# Altium PCB TicketMonitorSystemver2.PcbDoc
Units mil, origin at the board's own origin, x right, y up, seen from the top; angles counter-clockwise.
Board outline 3950.03 x 3380.03 mil, 2 copper layers (Top Layer, Bottom Layer); 47 components, 52 nets, 209 pads, 13 vias.
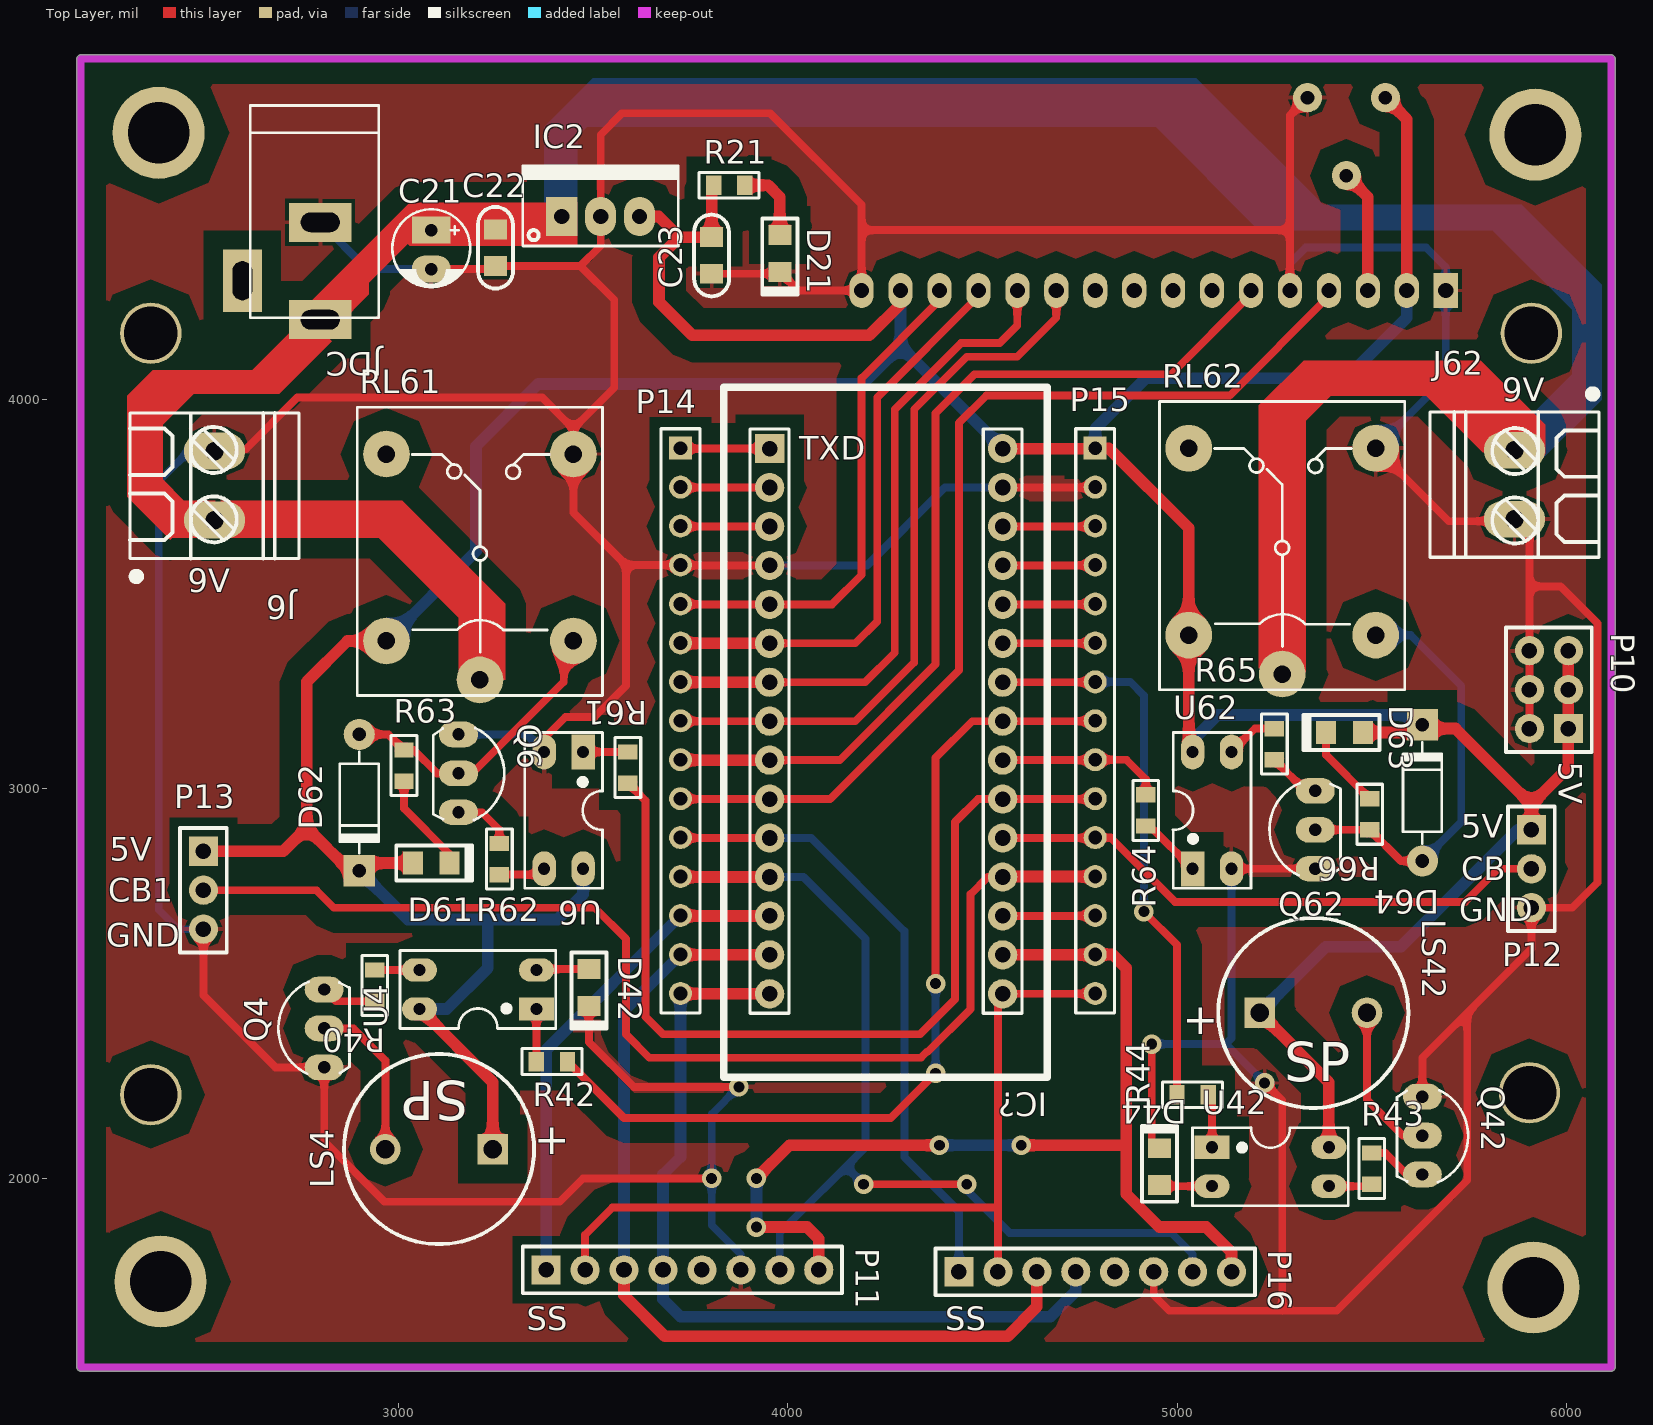
[diagram p0: Top Layer view]
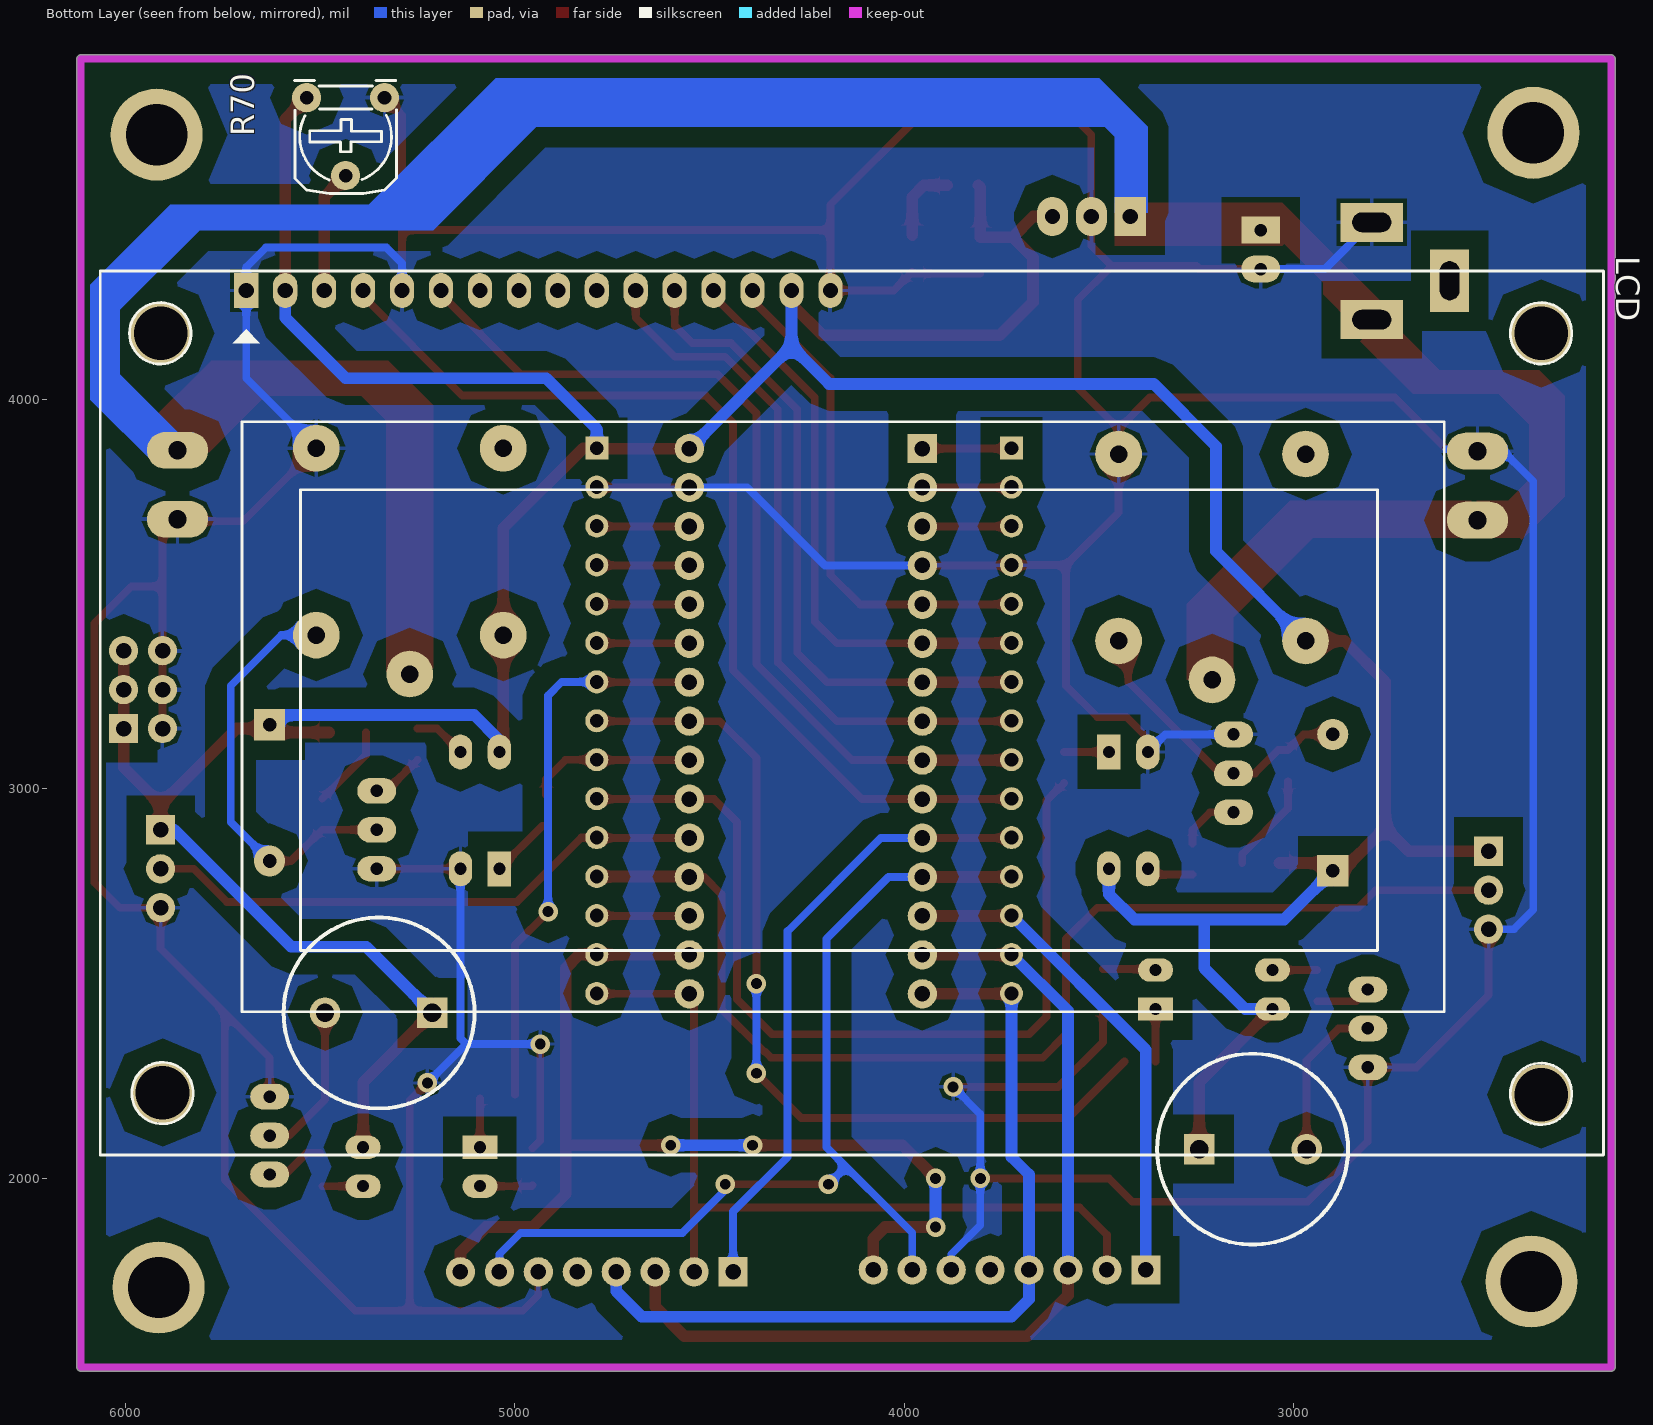
[diagram p1: Bottom Layer view, seen from below]
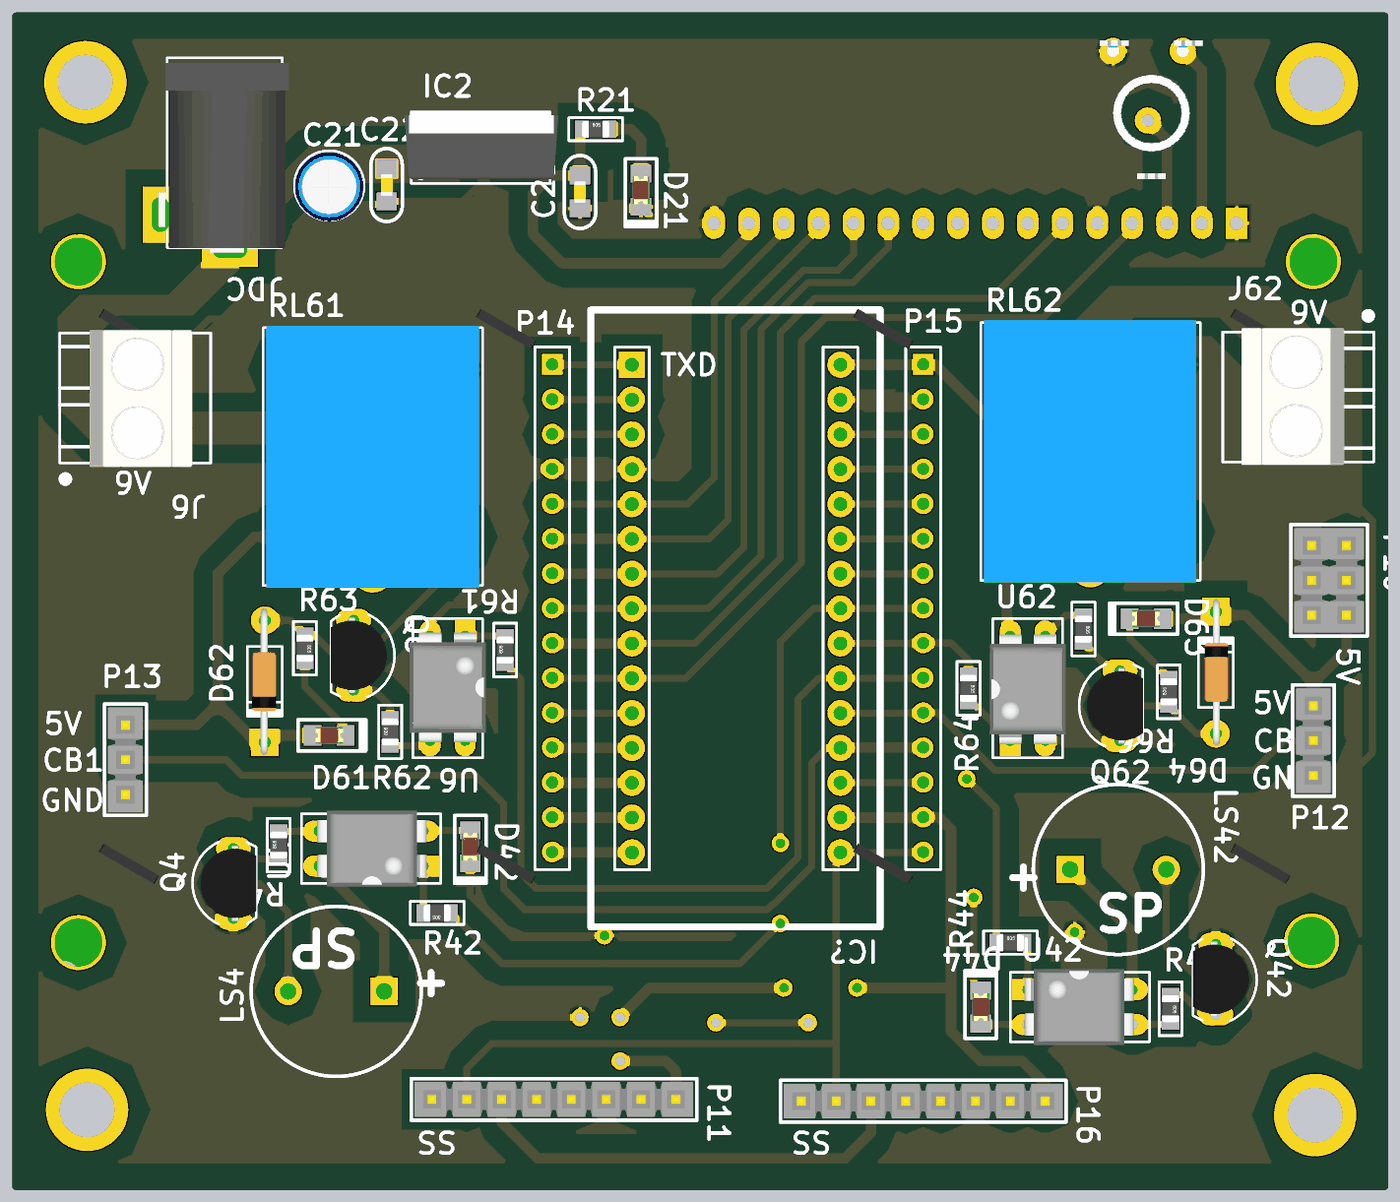
[diagram p2: 3D render of the assembled board from above, using the file's embedded part models]

## Layer stack, top to bottom
Top Solder: solder mask 0.4, Solder Resist, Dk 3.5
Top Layer: signal copper 1.4
Dielectric 1: dielectric 12.6, FR-4, Dk 4.8
Bottom Layer: signal copper 1.4
Bottom Solder: solder mask 0.4, Solder Resist, Dk 3.5

## Board outline
2174.99,1515 ccw(c2185,1515) 2185,1504.98 6115,1504.98 ccw(c6115,1515) 6125.02,1515 6125.02,4875 ccw(c6115,4875) 6115,4885.02 2185,4885.02 ccw(c2185,4875) 2174.99,4875

## Design rules (kind name [scope] priority, off if disabled: settings)
Clearance [All] p1: gap=50
PolygonConnect [All] p1: connectstyle=Relief reliefconductorwidth=10 reliefentries=4 polygonreliefangle="90 Angle" airgapwidth=10
RoutingVias [All] p1: holewidth=28 width=50 viastyle="Through Hole" minholewidth=28 minwidth=50 maxholewidth=28 maxwidth=50
SolderMaskExpansion [All] p1: expansion=4
Width [All] p1: maxlimit=60 minlimit=15 preferedwidth=20
30 further rules are at their usual default settings.

## Components (designator, comment, footprint, x,y, rotation, side; value= is the part's Value field where it differs from the comment)
C21 "100uF/16V" CP1/2 3085,4435 r270 top
C22 "Cap Non-pol" C-NP-0805 3250,4390 r90 top
C23 "Cap Non-pol" C-NP-0805 3805,4370 r90 top
D21 "LED" "LED-0805 RED" 3980,4375 r270 top
D42 "LED" "LED-0805 RED" 3490,2490 r270 top
D44 "LED" "LED-0805 RED" 4955,2030 r90 top
D61 "LED" "LED-0805 RED" 3085,2810 r0 top
D62 "1N4007" D1A 2900,3140 r90 top
D63 "LED" "LED-0805 RED" 5430,3145 r180 top
D64 "1N4007" D1A 5630,2815 r270 top
IC2 "LM7805" QTO-220 3420,4470 r0 top
IC? "Arduino Nano" Nano 4265,3185 r270 top
J6 "CON.Domino2" "Domino 2M" 2745,3965 r180 top
J62 "CON.Domino2" "Domino 2M" 5650,3595 r0 top
JDC "Jac DC" DC-IN 2700,4330 r270 top
LCD "LCD 20x4A" LCD20X4A 5690,4280 r180 bottom
LS4 "Speaker_1" SPEAKER 3105,2075 r180 top
LS42 "Speaker_1" SPEAKER 5350,2425 r0 top
P10 "Header 3x2" "Header 3x2" 6005,3155 r90 top
P11 "Header 8" "Header 8" 3380,1765 r0 top
P12 "Header 3" "Header 3" 5910,2895 r270 top
P13 "Header 3" "Header 3" 2500,2840 r270 top
P14 "Header 15" HDR1X15 3725,3875 r270 top
P15 "Header 15" HDR1X15 4790,3875 r270 top
P16 "Header 8" "Header 8" 4440,1760 r0 top
Q4 "C1815" QTO-92 2810,2385 r90 top
Q6 "C1815" QTO-92 3155,3040 r270 top
Q42 "C1815" QTO-92 5630,2110 r270 top
Q62 "C1815" QTO-92 5355,2895 r90 top
R21 "RES_SMD_0805" "DIEN TRO 0805" 3850,4550 r180 top
R40 "RES_SMD_0805" "DIEN TRO 0805" 2940,2495 r270 top
R42 "RES_SMD_0805" "DIEN TRO 0805" 3395,2300 r0 top
R43 "RES_SMD_0805" "DIEN TRO 0805" 5500,2025 r90 top
R44 "RES_SMD_0805" "DIEN TRO 0805" 5040,2215 r180 top
R61 "RES_SMD_0805" "DIEN TRO 0805" 3590,3055 r270 top
R62 "RES_SMD_0805" "DIEN TRO 0805" 3260,2820 r270 top
R63 "RES_SMD_0805" "DIEN TRO 0805" 3015,3060 r90 top
R64 "RES_SMD_0805" "DIEN TRO 0805" 4920,2945 r90 top
R65 "RES_SMD_0805" "DIEN TRO 0805" 5250,3115 r90 top
R66 "RES_SMD_0805" "DIEN TRO 0805" 5495,2935 r270 top
R70 "10K" VR 5335,4775 r0 bottom
RL61 "Relay 10A/12V" RL_SPDT_10A 3210,3280 r90 top
RL62 "Relay 10A/12V" RL_SPDT_10A 5270,3295 r90 top
U4 "TLP521-1" DIP4/W0.3 3355,2435 r90 top
U6 "TLP521-1" DIP4/W0.3 3475,3095 r180 top
U42 "TLP521-1" DIP4/W0.3 5090,2080 r270 top
U62 "TLP521-1" DIP4/W0.3 5040,2795 r0 top

## Footprints (in the part's own frame and the unit in brackets; to place one, negate y for a bottom-side part, rotate by r counter-clockwise, add the part's x,y. Pads: shape width x height; smd on the part's side, far side on the other; paste and mask are expansions set on the pad)
C-NP-0805 [mm] "Chip Capacitor; Non-polarized; Body 2.0 x 1.3 mm (LxW typ) [2012]"
  rect 1.3x1.5 smd: 1(-1.194,0) 2(1.194,0)
  silkscreen extent -2.67,-1.14 2.66,1.14, body extent -0.8,-0.43 0.8,0.43, height 0.79
CP1/2 [mil] "Tu hoa < 22uF/16>50V"
  rect 70x100 hole 32: 1(0,0)
  oval 70x100 hole 32: 2(100,0)
  silkscreen extent -53,-100 146,100, body extent -49,-99 149,99, height 287
D1A [mil] "Diode 1A, W 100mil, L 350mil"
  round 80 hole 35: 1(0,0)
  rect 80x80 hole 35: 2(-350,0)
  silkscreen extent -305,-50 -45,50, body extent -386,-33 34,36, height 84
DC-IN [mil] "Jac DC input"
  rect 100x160 hole 50 slot 100 at 90 deg: 1(125,100) 2(-125,100)
  rect 160x100 hole 50 slot 100 at 0 deg: 3(25,-100)
  silkscreen extent -425,-80 120,250, body extent -410,-105 134,269, height 434
"DIEN TRO 0805" [mil] "Chip Resistor; Body 2.0 x 1.3 mm (LxW typ)"
  rect 39.37x50 smd: 1(-40,0) 2(40,0)
  silkscreen extent -77,-33 77,33, body extent -39,-25 39,25, height 31
DIP4/W0.3 [mil] "4 PIN, W 300mil, Pin to pin 100mil"
  rect 60x90 hole 31: 1(0,0)
  oval 60x90 hole 31: 2(100,0) 3(100,300) 4(0,300)
  silkscreen extent -50,-50 150,350, body extent -59,-10 159,305, height 170
"Domino 2M" [mm]
  oval 4x2.4 hole 1.2: 1(5.5,6.975) 2(5.5,2.475)
  silkscreen extent 0,0 11,10.9, body extent 1.35,-0.22 8.85,9.78, height 10
HDR1X15 [mm] "Connector; Header; 15 Position"
  rect 1.5x1.5 hole 0.9: 1(0,0)
  round 1.5 hole 0.9: 2(2.54,0) 3(5.08,0) 4(7.62,0) 5(10.16,0) 6(12.7,0) 7(15.24,0) 8(17.78,0) 9(20.32,0) 10(22.86,0) 11(25.4,0) 12(27.94,0) 13(30.48,0) 14(33.02,0) 15(35.56,0)
  silkscreen extent -1.27,-1.27 36.83,1.27
"Header 3" [mil] "Connector; Header; 3 Position; Solder Pad 35mil"
  rect 75x75 hole 40: 1(0,0)
  round 75 hole 40: 2(100,0) 3(200,0)
  silkscreen extent -60,-60 260,60, body extent -50,-50 250,50, height 83
"Header 3x2" [mil] "Connector; Header; 6 Position; 2 Row; Solder Pad 35mil"
  rect 75x75 hole 40: 1(0,0)
  round 75 hole 40: 2(0,100) 3(100,0) 4(100,100) 5(200,0) 6(200,100)
  silkscreen extent -60,-60 260,160, body extent -50,-50 250,150, height 83
"Header 8" [mil] "Connector; Header; 8 Position; Solder Pad 35mil"
  rect 75x75 hole 40: 1(0,0)
  round 75 hole 40: 2(100,0) 3(200,0) 4(300,0) 5(400,0) 6(500,0) 7(600,0) 8(700,0)
  silkscreen extent -60,-60 760,60, body extent -50,-50 750,50, height 330
LCD20X4A [mil] "LCD dipslay 20x4, 16 pin"
  rect 62x90 hole 39: 1(0,0)
  oval 62x90 hole 39: 2(100,0) 3(200,0) 4(300,0) 5(400,0) 6(500,0) 7(600,0) 8(700,0) 9(800,0) 10(900,0) 11(1000,0) 12(1100,0) 13(1200,0) 14(1300,0) 15(1400,0) 16(1500,0)
  round 157.48 hole 137.8: "Hole 0"(-220,-110) "Hole 0"(-215,-2060) "Hole 0"(3325,-2065) "Hole 0"(3325,-110)
  silkscreen extent -375,-2220 3485,50, body extent -392,-2264 3466,98, height 417
"LED-0805 RED" [mm] "Chip LED; RED; Body 2.0 x 1.3 mm (LxW typ) [2012]"
  rect 1.3x1.5 smd: 1(-1.204,0) 2(1.204,0)
  silkscreen extent -2.29,-1.14 2.67,1.14, body extent -1.01,-0.63 1.01,0.62, height 1.1
Nano [mm]
  rect 1.905x1.905 hole 1.016: 1(-17.5,-7.9)
  round 1.905 hole 1.016: 2(-14.96,-7.9) 3(-12.42,-7.9) 4(-9.88,-7.9) 5(-7.34,-7.9) 6(-4.8,-7.9) 7(-2.26,-7.9) 8(0.28,-7.9) 9(2.82,-7.9) 10(5.36,-7.9) 11(7.9,-7.9) 12(10.44,-7.9) 13(12.98,-7.9) 14(15.52,-7.9) 15(18.06,-7.9) 16(18.06,7.3) 17(15.52,7.3) 18(12.98,7.3) 19(10.44,7.3) 20(7.9,7.3) 21(5.36,7.3) 22(2.82,7.3) 23(0.28,7.3) 24(-2.26,7.3) 25(-4.8,7.3) 26(-7.34,7.3) 27(-9.88,7.3) 28(-12.42,7.3) 29(-14.96,7.3) 30(-17.5,7.3)
  silkscreen extent -21.5,-10.9 23.5,10.2
QTO-92 [mil] "TO-92"
  oval 66x100 hole 32: 1(-100,0) 2(0,0) 3(100,0)
  silkscreen extent -117,-65 120,118, body extent -109,-66 109,95, height 245
QTO-220 [mil] "TO-220 - 1-2-3"
  rect 80x100 hole 39: 1(0,0)
  oval 80x100 hole 39: 2(100,0) 3(200,0)
  silkscreen extent -100,-76 300,130, body extent -119,-64 322,121, height 755
RL_SPDT_10A [mil] "Relay SPDT, 5 pin, 10A,W 650mil, L 800mil, H 800mil"
  round 120 hole 45: 1(0,0) 2(580,240) 3(580,-240) 4(100,-240) 5(100,240)
  silkscreen extent -40,-315 700,315, body extent -46,-304 706,306, height 602
SPEAKER [mm] "Speaker footprint"
  rect 2x2 hole 1.2: 1(-3.5,0)
  round 2 hole 1.2: 2(3.5,0)
  silkscreen extent -6.2,-6.2 6.2,6.2, body extent -6.2,-6.2 6.2,6.2, height 10.02
VR [mil] "Resistor Variable"
  round 75 hole 35: 1(0,0) 2(100,200) 3(200,0)
  silkscreen extent -31,-44 231,246, body extent -87,-30 307,372, height 165

## Part data
C21: library part CP1, "Cap P  0,1uF < 22uF , 16 - 50V"
C22 C23: "Non-polarized Capacitor"
D21 D42 D44 D61 D63: "Typical LED"
D62 D64: library part D1A, "Diode 1A"
IC2: library part LM78xx, "On ap +, from + 5 to + 24VDC"
J6 J62: "2 pins Domino Header"
JDC: library part DCIN, "Jac DC input"
LCD: library part LCD20x4A, "LCD dipslay 20 char, 4 line"
LS4 LS42: "Loudspeaker"
P10: "Header, 6-Pin, 2-Row"
P11 P16: "Header, 8-Pin"
P12 P13: "Header, 3-Pin"
P14 P15: "Header, 15-Pin"
Q4 Q6 Q42 Q62: "NPN 600mW, ECB"
R21 R40 R42 R43 R44 R61 R62 R63 R64 R65 R66: "RES_0805"
R70: library part VR, "Var Resistor"
RL61 RL62: library part "Relay 1", "Relay SPDT,10A - 12VDC 5 Pin"
U4 U6 U42 U62: "Single Opto"

## Free pads (board coordinates)
  round 236.22 hole 157.48: 2(2385,4685) 2(2390,1735) 2(5915,1720) 2(5920,4680)

## Via types
v1: diameter 50, hole 28, Top Layer to Bottom Layer, 13 vias

## Nets (pads, with @x,y where several pads share a name; then routed paths per layer and width w, separated by ;. In a path a pad name is that pad's centre, name@x,y a point inside that pad or via, vN(x,y) a via of type N, cw(c..) or ccw(c..) an arc to the next point about the centre after c; other vN are vias at no path point)
3V3: IC?.17 P11.8 P15.14 P16.8 | length 2652.3
  Top Layer w30: v1(3920,1875) 4050,1875 4080,1845 P11.8 ; v1(3920,2000) 4005,2085 v1(4390,2085) ; IC?.17 4788.98,2573.98 P15.14 4835,2575 4870,2540 4870,1960 4955,1875 5075,1875 5140,1810 P16.8 ; v1(4600,2085) 4865,2085
  Bottom Layer w30: v1(3920,1875) v1(3920,2000) ; v1(4390,2085) v1(4600,2085)
5V: C23.2 D61.1 D62.2 D63.1 D64.2 IC2.3 IC?.30 LCD.2 LCD.15 LS4.1 LS42.1 P10.1 P10.3 P10.5 P12.1 P13.1 P15.1 R21.2 R70.3 RL61.5 RL62.5 U4.4 U6.4 U42.4 U62.4 | length 11965.1
  Top Layer w30: P13.1 2705,2840 2765,2900 ; RL61.5 2870,3380 2765,3275 2765,2900 ; D61.1 2920,2810 D62.2 2875,2790 2765,2900 ; U4.4 3242.8,2247.2 LS4.1 ; IC2.3 3669,4470 3722,4417 ; R21.2 3805,4545 C23.2 3722,4417 ; LCD.15 4290,4245 4210,4165 3755,4165 3670,4250 3670,4365 3722,4417 ; IC?.30 4788.98,3873.98 P15.1 4825,3875 5030,3670 RL62.5 5030,3105 U62.4 ; LS42.1 5390,2247.2 U42.4 ; D63.1 D64.2@5610,3145 ; R70.3 5590,4720 LCD.2 ; D64.2 5640,3155 5715,3155 5910,2960 ; P12.1 5910,2960 ; P10.5 P10.3 P10.1 6005,3055 5910,2960
  Bottom Layer w30: D62.2 3025,2665 3225,2665 ; RL61.5 3200,3610 3200,3880 3360,4040 4193.62,4040 4290,4136.38 ; U4.4 3125,2435 3230,2540 3230,2660 3225,2665 ; U6.4 3475,2730 3410,2665 3225,2665 ; LCD.15 4290,4136.38 ; IC?.30 4290,4136.38 ; P15.1 4790,3925 4920,4055 5435,4055 5590,4210 LCD.2 ; U62.4 5040,3125 5105,3190 5605,3190 D64.2 ; LS42.1 5382.2,2595 5575,2595 5875,2895 P12.1
9V: C21.1 C22.2 IC2.1 J6.1 J62.1 JDC.1 RL61.1 RL62.1 | length 7577
  Top Layer w30: JDC.1 3030,4435 C21.1 3248,4435 C22.2 3387,4437 IC2.1 ; JDC.1@2812.5,4192.5 2660,4040 2435,4040 2350,3955 2350,3775 2429.61,3695.39 2974.61,3695.39 3210,3460 RL61.1 ; RL62.1 5285,3310 5285,3940 5400,4055 5680,4055 5870.39,3864.61 J62.1@5931.54,3864.61
  Bottom Layer w30: IC2.1 3420,4675 3510,4765 5000,4765 5290,4475 5805,4475 6040,4240 6040,4043.07 5891.54,3894.61 J62.1@5891.54,3869.61
BUZZER_1: IC?.23 P15.8 R42.2 | length 2312
  Top Layer w20: R42.2 3580,2155 4265,2155 v1(4380,2270) ; v1(4380,2500) 4380,3080 4473.98,3173.98 IC?.23 4788.98,3173.98 P15.8
  Bottom Layer w20: v1(4380,2270) v1(4380,2500)
BUZZER_2: IC?.24 P15.7 R44.2 | length 1437.7
  Top Layer w20: IC?.24 4788.98,3273.98 P15.7 ; v1(4915,2685) 5000,2600 R44.2
  Bottom Layer w20: P15.7 4880,3275 4915,3240 v1(4915,2685)
D4_LCD: IC?.8 LCD.11 P14.8 | length 1845.3
  Top Layer w20: P14.8 3726.02,3173.98 IC?.8 4173.98,3173.98 4325,3325 4325,3975 4460,4110 4590,4110 4690,4210 LCD.11
D5_LCD: IC?.7 LCD.12 P14.7 | length 1700.7
  Top Layer w20: IC?.7 4198.98,3273.98 4275,3350 4275,3974.5 4445.5,4145 4545,4145 4590,4190 LCD.12
  Top Layer w30: P14.7 3726.02,3273.98 IC?.7
D6_LCD: IC?.6 LCD.13 P14.6 | length 1486.3
  Top Layer w20: IC?.6 4173.98,3373.98 4230,3430 4230,4005 4490,4265 LCD.13
  Top Layer w30: P14.6 3726.02,3373.98 IC?.6
D7_LCD: IC?.5 LCD.14 P14.5 | length 1309.8
  Top Layer w20: P14.5 3726.02,3473.98 IC?.5 4113.98,3473.98 4190,3550 4190,4055 4390,4255 LCD.14
EN_LCD: IC?.9 LCD.6 P14.9 | length 2348.7
  Top Layer w20: IC?.9 4133.98,3073.98 4380,3320 4380,3965 4480,4065 4985,4065 5190,4270 LCD.6
  Top Layer w30: P14.9 3726.02,3073.98 IC?.9
GND: C21.2 C22.1 C23.1 D21.2 D42.2 D44.2 IC2.2 IC?.4 IC?.29 J6.2 J62.2 JDC.2 LCD.1 LCD.5 LCD.16 P10.2 P10.4 P10.6 P11.6 P12.3 P13.3 P14.4 P15.2 P16.6 Q4.1 Q6.1 Q42.1 Q62.1 R70.1 RL61.3 RL62.3 U6.2 U62.2 | length 19559.8
  Top Layer w20: P13.3 2500,2470 2685,2285 Q4.1 2810,2095 2965,1940 3415,1940 3475,2000 v1(3805,2000) ; 2608.46,3872.56 2740.91,4005 3370,4005 3450,3925 ; C21.2 3242,4335 C22.1 3468,4343 ; U6.2 3375,3130 3430,3185 3505,3185 3585,3265 3585,3575 ; D42.2 3490,2350 3605,2235 v1(3875,2235) ; C23.1 3975.4,4323 D21.2 4027.6,4280 LCD.16 4190,4500 3955,4735 3575,4735 3520,4680 3520,4395 3468,4343 ; IC?.4 3726.02,3573.98 P14.4 3585,3575 ; 4190,4435 5290,4435 ; IC?.29 4788.98,3773.98 P15.2 ; v1(4935,2345) 4935,2097.4 D44.2 ; P16.6 4940,1700 4980,1660 5270,1660 ; U62.2 Q62.1 ; v1(5225,2245) 5270,2200 5270,1660 ; LCD.5 5290,4435 ; R70.1 5290,4730 5290,4435 ; RL62.3 5697.56,3687.44 5931.54,3687.44 5905,3660.91 5905,3520 ; Q42.1 5630,2310 5745,2425 ; P10.2 P10.4 P10.6 5905,3520 ; 3450,3925 RL61.3 3450,3710 3585,3575 ; 3450,3925 3555,4030 3555,4256 3468,4343 ; 5270,1660 5410,1660 5745,1995 5745,2425 ; 5745,2425 5910,2590 P12.3 6015,2695 6080,2760 6080,3425 5985,3520 5905,3520
  Bottom Layer w20: P13.3 2435,2640 2385,2690 2385,3790 2467.56,3872.56 2608.46,3872.56 ; JDC.2 2920,4335 C21.2 ; Q6.1 3330,3140 U6.2 ; v1(3875,2235) 3805,2165 v1(3805,2000) 3805,1880 3880,1805 P11.6 ; IC?.4 4203.98,3573.98 4403.98,3773.98 IC?.29 ; v1(4935,2345) 5125,2345 ; U62.2 5140,2360 5125,2345 ; v1(5225,2245) 5125,2345 ; LCD.5 5290,4350 5330,4390 5640,4390 5690,4340 LCD.1 5690,4055 RL62.3
INFRARED_RFID_1: IC?.19 P13.2 P15.12 | length 2977
  Top Layer w20: P13.2 2790,2740 2835,2695 3505,2695 3585,2615 3585,2370 3645,2310 4342.22,2310 4357.22,2325 4360,2325 4470,2435 4470,2730 4513.98,2773.98 IC?.19
  Top Layer w30: IC?.19 4553.43,2775 P15.12
INFRARED_RFID_2: IC?.20 P12.2 P15.11 | length 1461.6
  Top Layer w20: IC?.20 4788.98,2873.98 P15.11 4830,2875 4995,2710 5740,2710 5825,2795 P12.2
MISO_RFID: IC?.15 P11.4 P14.15 P16.4 | length 2188.6
  Top Layer w30: P14.15 3726.02,2473.98 IC?.15
  Bottom Layer w30: P14.15 3725,2055 3680,2010 P11.4 3680,1690 3725,1645 4675,1645 4740,1710 P16.4
MOSI_RFID: IC?.14 P11.3 P14.14 P16.3 | length 2389
  Top Layer w30: P11.3 3580,1700 3685,1595 4565,1595 4640,1670 P16.3 ; P14.14 3726.02,2573.98 IC?.14
  Bottom Layer w30: P11.3 3580,2430 P14.14
NetD21_1: D21.1 R21.1 | length 200
  Top Layer w30: R21.1 3950,4550 3980,4520 D21.1
NetD42_1: D42.1 U4.2 | length 136
  Top Layer w20: U4.2 3357.4,2537.4 D42.1
NetD44_1: D44.1 U42.2 | length 136.1
  Top Layer w20: D44.1 4957.6,1980 U42.2
NetD61_2: D61.2 R63.1 | length 258.6
  Top Layer w20: R63.1 3015,2950 3132.4,2832.6 D61.2
NetD62_1: D62.1 Q6.2 R63.2 RL61.4 | length 779.1
  Top Layer w20: D62.1 2975,3140 R63.2 3040,3100 3100,3040 Q6.2 3190,3040 3425,3275 3425,3355 RL61.4
NetD63_2: D63.2 R66.1 | length 216.6
  Top Layer w20: D63.2 5382.6,3087.4 R66.1
NetD64_1: D64.1 Q62.2 R66.2 RL62.4 | length 1073.4
  Top Layer w20: Q62.2 R66.2 5575,2815 D64.1
  Bottom Layer w20: RL62.4 5600,3395 5730,3265 5730,2915 D64.1
NetIC?_1: IC?.1 P14.1 | length 228
  Top Layer w20: P14.1@3726.02,3873.98 IC?.1
NetIC?_2: IC?.2 P14.2 | length 229.4
  Top Layer w20: P14.2 3726.02,3773.98 IC?.2
NetIC?_3: IC?.3 P14.3 | length 229.4
  Top Layer w20: P14.3 3726.02,3673.98 IC?.3
NetIC?_18: IC?.18 P15.13 | length 238
  Top Layer w20: IC?.18 4788.98,2673.98 P15.13
NetIC?_25: IC?.25 P15.6 | length 238
  Top Layer w20: IC?.25 4788.98,3373.98 P15.6
NetIC?_26: IC?.26 P15.5 | length 238
  Top Layer w20: IC?.26 4788.98,3473.98 P15.5
NetIC?_27: IC?.27 P15.4 | length 238
  Top Layer w20: IC?.27 4788.98,3573.98 P15.4
NetIC?_28: IC?.28 P15.3 | length 238
  Top Layer w20: IC?.28 4788.98,3673.98 P15.3
NetLCD_3: LCD.3 R70.2 | length 317.8
  Top Layer w30: R70.2 5490,4520 LCD.3
NetLS4_2: LS4.2 Q4.2 | length 419.1
  Top Layer w20: Q4.2 2885,2385 2967.2,2302.8 LS4.2
NetLS42_2: LS42.2 Q42.2 | length 403.2
  Top Layer w20: LS42.2 5487.8,2202.2 5580,2110 Q42.2
NetQ4_3: Q4.3 R40.2 | length 142.4
  Top Layer w20: Q4.3 2840,2455 R40.2
NetQ6_3: Q6.3 R62.1 | length 158.6
  Top Layer w20: Q6.3 3215,2940 3260,2895 R62.1
NetQ42_3: Q42.3 R43.2 | length 152.8
  Top Layer w20: R43.2 5535,2065 5590,2010 Q42.3
NetQ62_3: Q62.3 R65.1 | length 113.1
  Top Layer w20: R65.1 Q62.3@5330,2995
NetR40_1: R40.1 U4.3 | length 115
  Top Layer w20: R40.1 U4.3
NetR42_1: R42.1 U4.1 | length 135
  Top Layer w20: R42.1 U4.1
NetR43_1: R43.1 U42.3 | length 105
  Top Layer w20: U42.3 R43.1@5495,1980
NetR44_1: R44.1 U42.1 | length 125
  Top Layer w20: U42.1 R44.1@5090,2205
NetR61_1: R61.1 U6.1 | length 115
  Top Layer w20: U6.1 R61.1
NetR62_2: R62.2 U6.3 | length 121.2
  Top Layer w20: R62.2 3360,2780 U6.3
NetR64_1: R64.1 U62.1 | length 165.6
  Top Layer w20: R64.1 4930,2905 U62.1
NetR65_2: R65.2 U62.3 | length 134.9
  Top Layer w20: U62.3 5200,3155 R65.2
RELAY_1: IC?.21 P15.10 R61.2 | length 2308
  Top Layer w20: R61.2 3635,2970 3635,2415 3680,2370 4340,2370 4430,2460 4430,2915 4488.98,2973.98 IC?.21 P15.10@4788.98,2973.98
RELAY_2: IC?.22 P15.9 R64.2 | length 428.7
  Top Layer w20: IC?.22 4788.98,3073.98 P15.9 4870,3075 4920,3025 R64.2
RS_LCD: IC?.10 LCD.4 P14.10 | length 2587.2
  Top Layer w20: P14.10 3726.02,2973.98 IC?.10 4108.98,2973.98 4440,3305 4440,3940 4510,4010 5135,4010 5390,4265 LCD.4
RST_RFID: IC?.12 P11.7 P14.12 P16.7 | length 2534.4
  Top Layer w20: v1(4195,1985) v1(4460,1985) v1@4460,1970
  Top Layer w30: P14.12 3726.02,2773.98 IC?.12
  Bottom Layer w20: IC?.12 4041.02,2773.98 4200,2615 4200,2080 3980,1860 P11.7 ; 4150,2030 v1(4195,1985) ; v1(4460,1985) 4460,1970 4570,1860 4985,1860 5040,1805 P16.7
SCK_RFID: IC?.16 P11.2 P15.15 P16.2 | length 2136.1
  Top Layer w20: P11.2 3480,1855 3550,1925 4540,1925 ; P16.2 4540,2461.57 IC?.16 4788.98,2473.98 P15.15
SS_RFID_1: IC?.13 P11.1 P14.13 | length 1282.3
  Top Layer w30: P14.13 3726.02,2673.98 IC?.13
  Bottom Layer w30: P11.1 3380,2330 P14.13
SS_RFID_2: IC?.11 P14.11 P16.1 | length 1607.4
  Top Layer w20: P14.11 3726.02,2873.98 IC?.11
  Bottom Layer w20: IC?.11 4061.02,2873.98 4300,2635 4300,2055 4440,1915 P16.1
pads on no net: "LCD.Hole 0" JDC.3 LCD.7 LCD.8 LCD.9 LCD.10 P11.5 P16.5 RL61.2 RL62.2

## Polygon pours and split planes (outlines as drawn)
GND on Top Layer "G2" (solid, remove dead copper, pour order 0): 2230,4835 2230,1560 2240,1550 6075,1550 6075,4815 6065,4825
GND on Bottom Layer "G2" (solid, remove dead copper, pour order 2): 2245,4845 2245,1585 6075,1585 6085,1595 6080,1600 6080,4835

## Keep-outs
Keep-Out Layer:
  lines w20: 2185,1515 6115,1515 6115,4875 2185,4875 2185,1515

## Other copper
Top Layer:
  region net 9V: 2545,3740 3010,3740 3275,3475 3275,3280 3150,3280 3155,3285 3155,3440 2950,3645 2535,3645
  region net 9V: 2530,3740 2450,3740 2395,3795 2395,3935 2475,4015 2695,4015 2830,4150 2775,4205 2755,4205 2625,4075 2370,4075 2305,4010 2305,3750 2415,3640 2420,3645 2535,3645
  region net 9V: 5210,3310 5210,3985 5325,4100 5780,4100 5945,3935 5945,3865 5785,3865 5640,4010 5395,4010 5330,3945 5330,3300
  region net 9V: 3460,4505 3030,4505 2780,4255 2845,4190 2925,4270 2925,4300 3025,4400 3030,4395 3460,4395
Bottom Layer:
  region net 9V: 5825,3915 5865,3915 6015,4065 6015,4230 5810,4435 5210,4435 4945,4700 3485,4700 3460,4675 3460,4480 3375,4480 3375,4700 3500,4825 5050,4825 5375,4500 5885,4500 6090,4295 6090,4000 5920,3830

## Silkscreen, mask and mechanical layers (free items; w line width, h text height)
Top Overlay:
  text "9V" at 5835,3995 h60
  text "TXD" at 4030,3845 h60
  text "9V" at 2460,3505 h60
  text "5V" at 5980,3070 h60 r270
  text "5V" at 5730,2875 h60
  text "5V" at 2260,2815 h60
  text "CB" at 5730,2765 h60
  text "CB1" at 2255,2710 h60
  text "GND" at 5725,2660 h60
  text "GND" at 2250,2595 h60
  text "SS" at 3330,1610 h60
  text "SS" at 4405,1610 h60

## Text inside footprints (layer, text, board x,y; h text height)
LS4: Top Overlay "+" at 3440,2130 h80 r180; Top Overlay "SP" at 3180,2250 h100 r180
LS42: Top Overlay "SP" at 5275,2250 h100; Top Overlay "+" at 5015,2370 h80